# Altium PCB PCB.PcbDoc
Units mm, origin at the board's own origin, x right, y up, seen from the top; angles counter-clockwise.
Board outline 57.66 x 38.61 mm, 4 copper layers (Top Layer, Signal Layer 1, Signal Layer 2, Bottom Layer), stack 1.54 mm thick; 26 components, 96 nets, 348 pads, 113 vias.
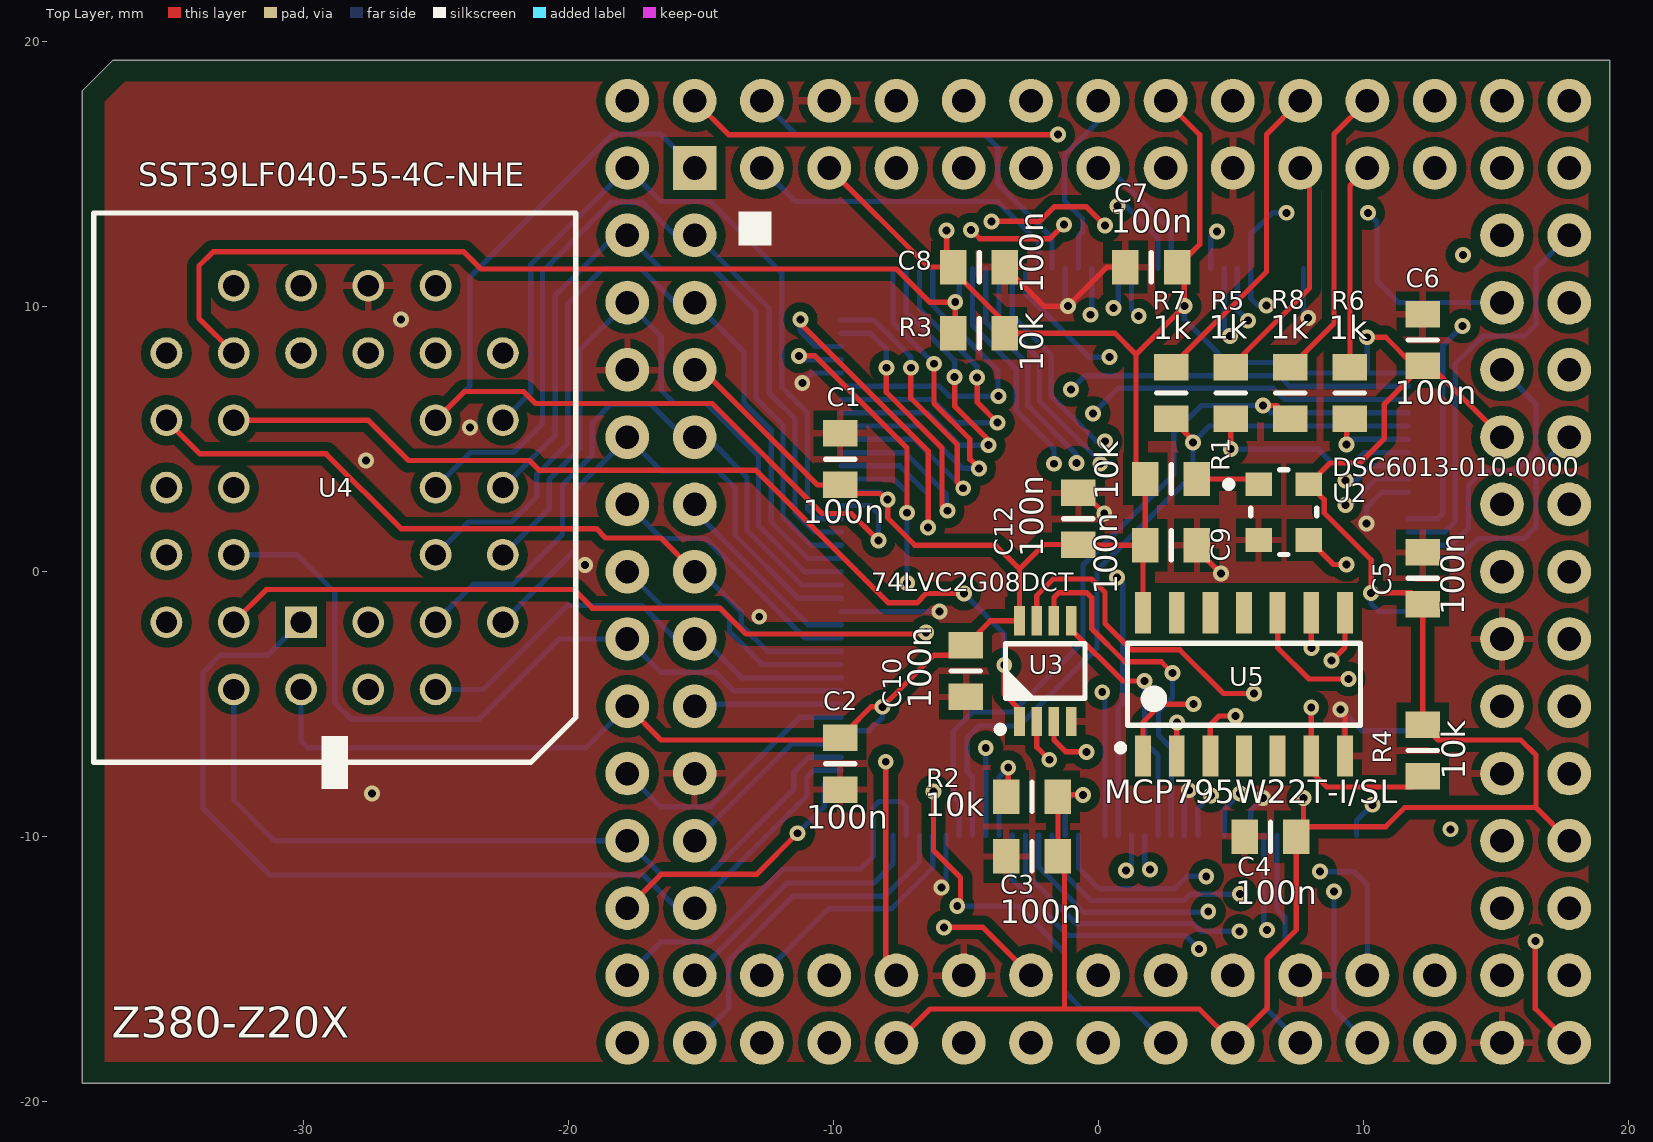
[diagram p0: Top Layer view]
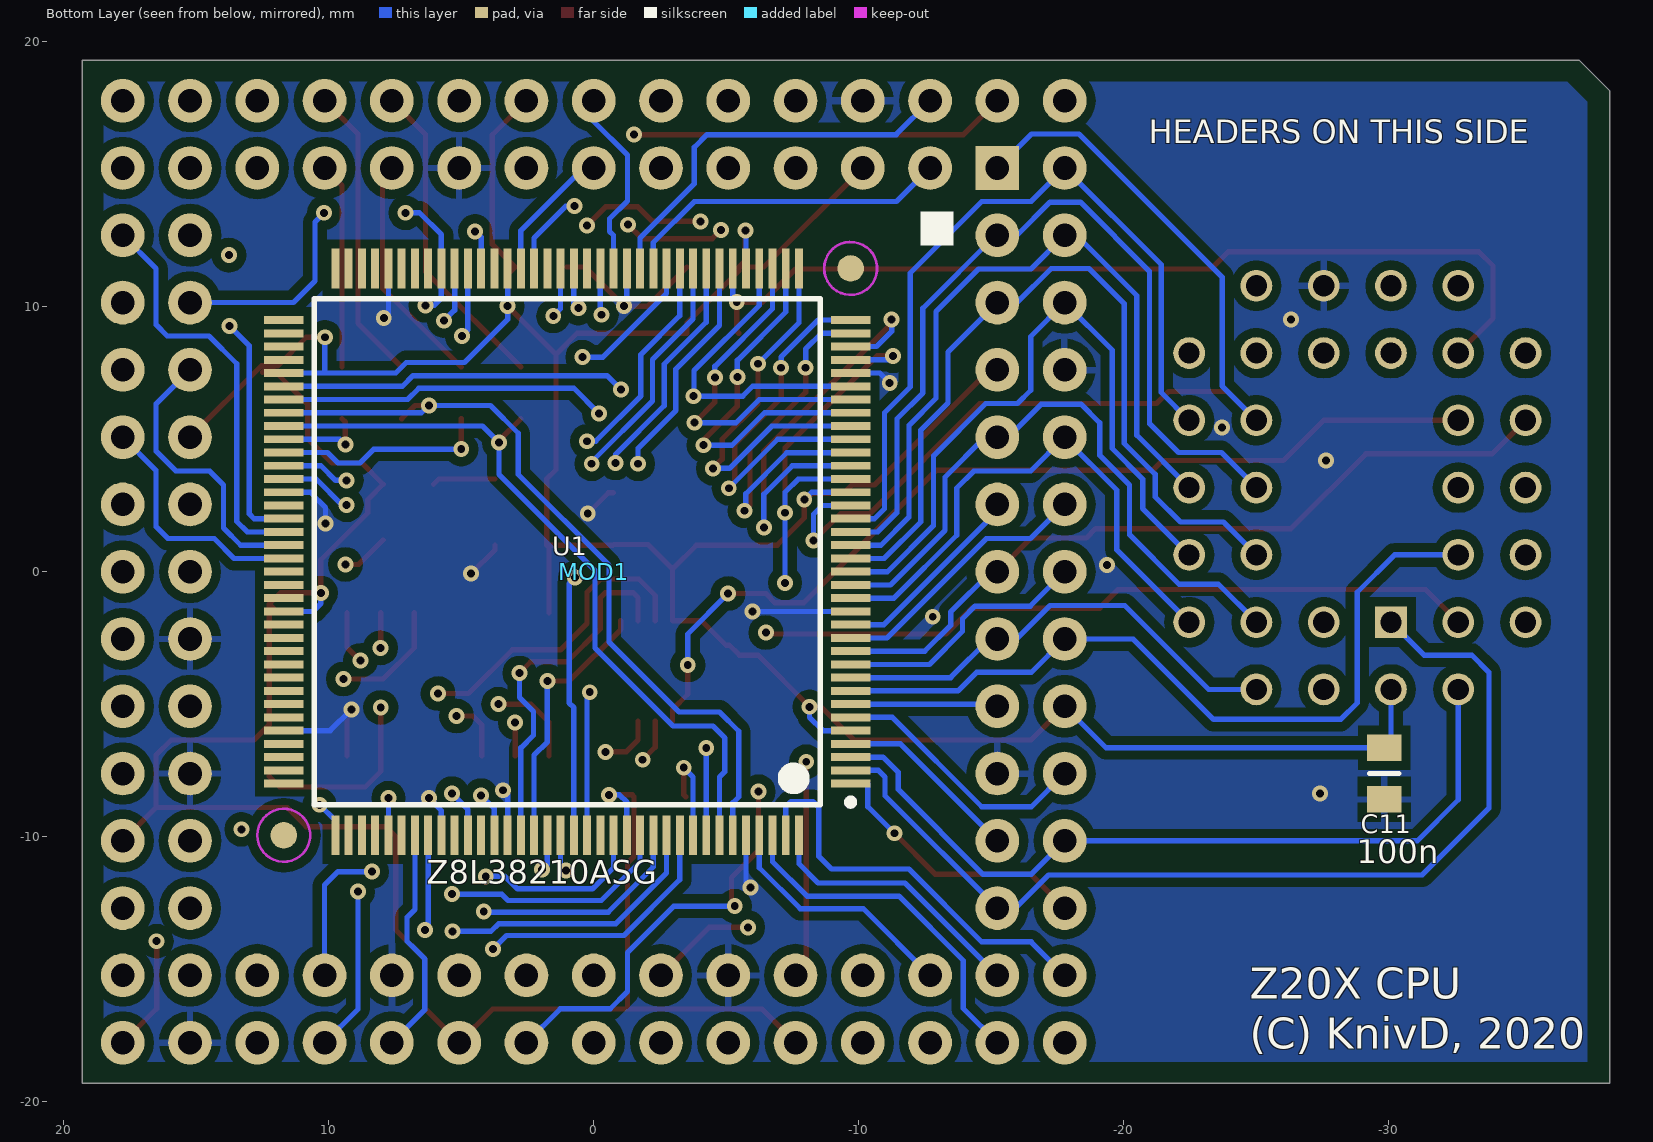
[diagram p1: Bottom Layer view, seen from below]
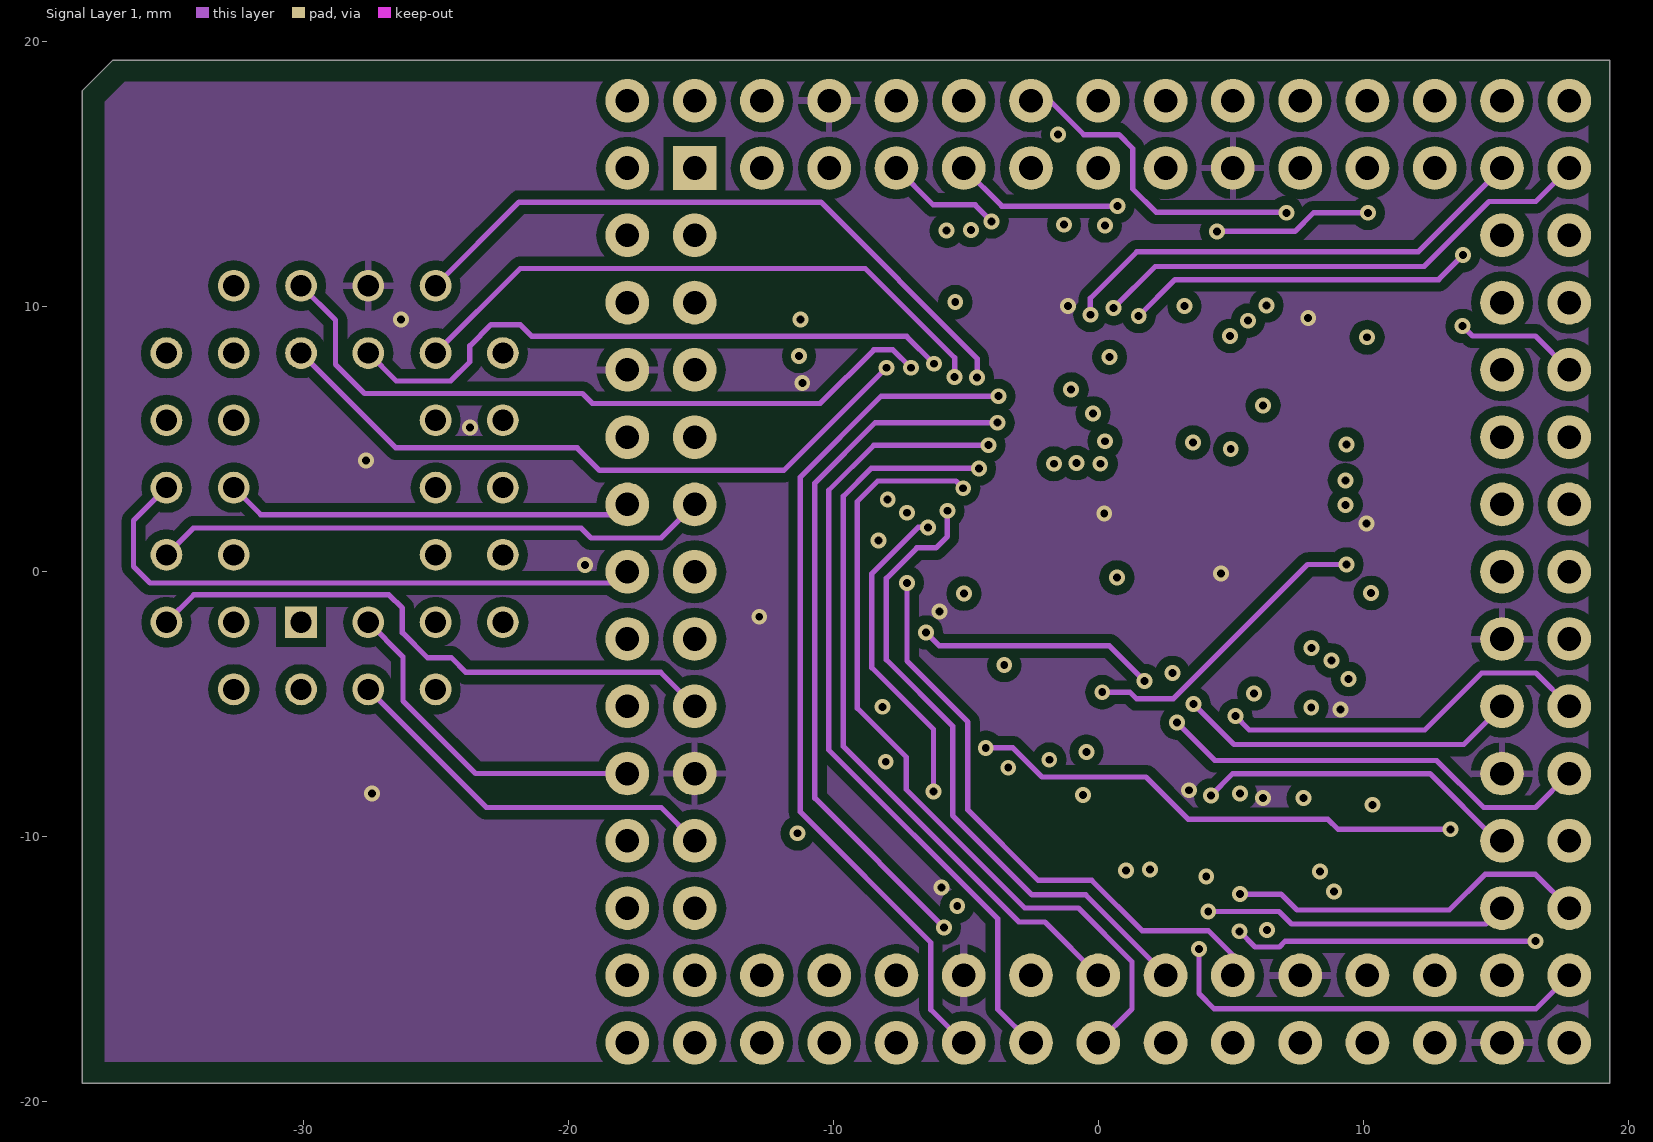
[diagram p2: Signal Layer 1]
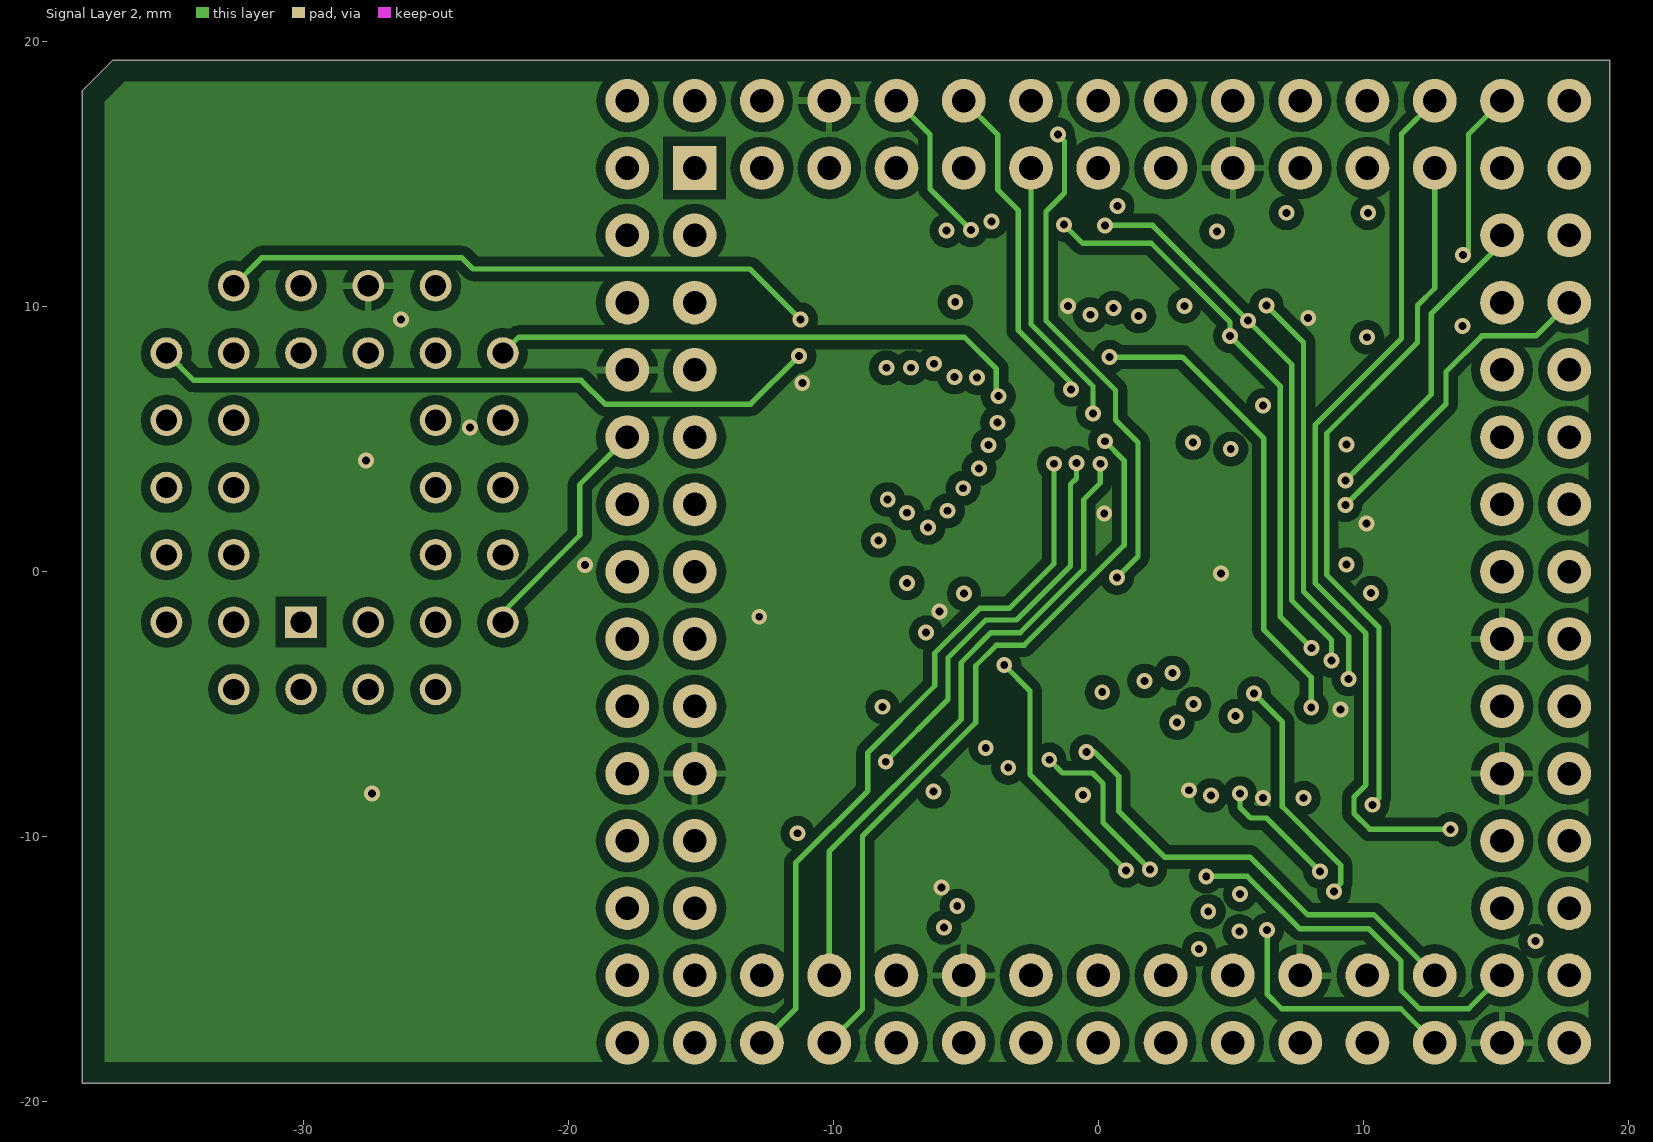
[diagram p3: Signal Layer 2]
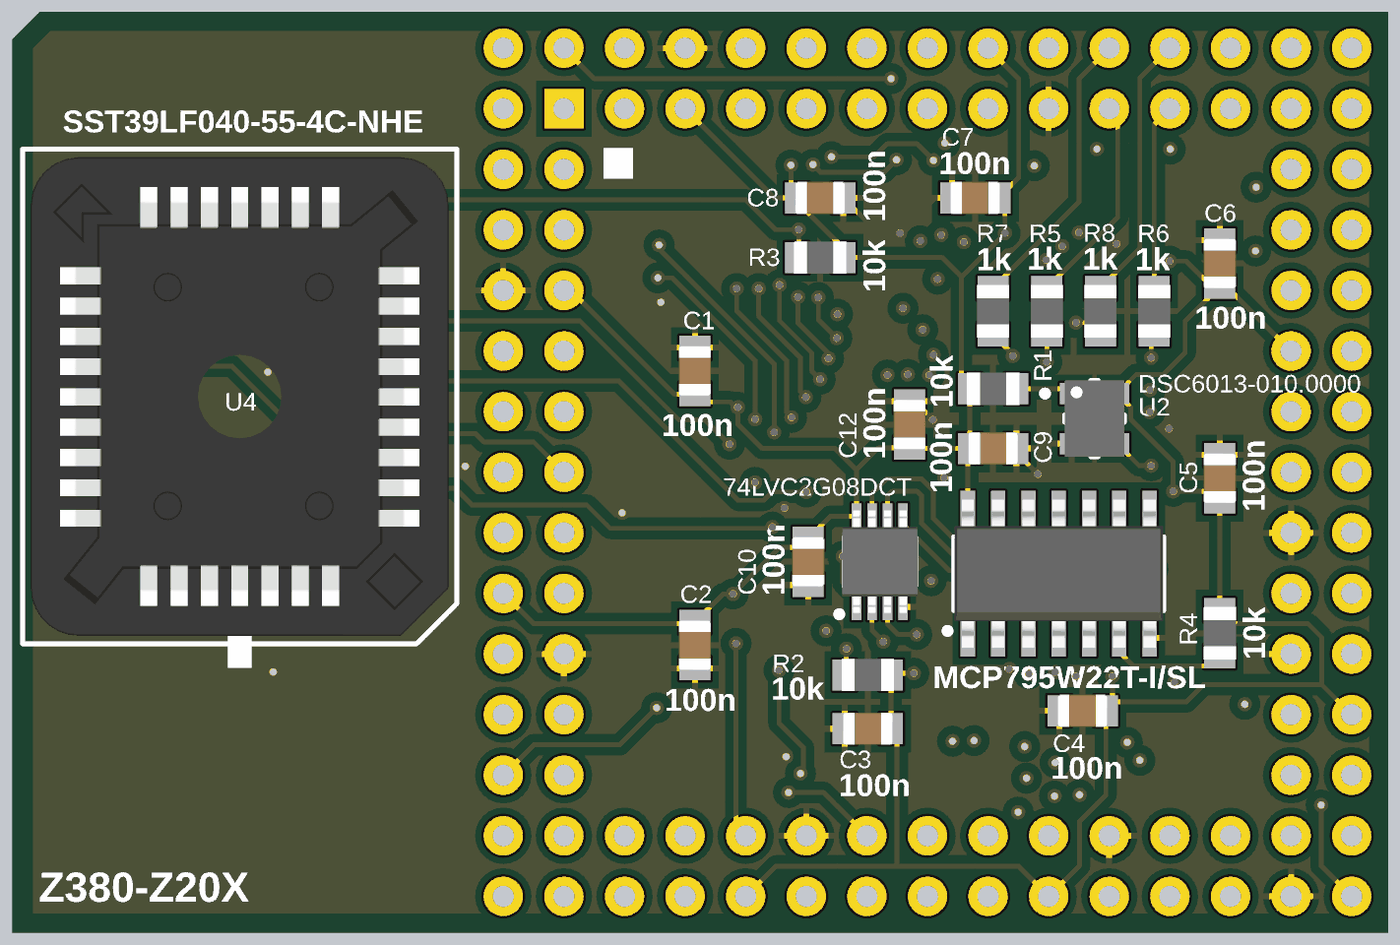
[diagram p4: 3D render of the assembled board from above, using the file's embedded part models]

## Layer stack, top to bottom
Top Solder: solder mask 0.0102, Solder Resist, Dk 3.5
Top Layer: signal copper 0.0356
Dielectric 1: core 0.508, FR-4, Dk 4.2
Signal Layer 1: signal copper 0.036
Dielectric 3: prepreg 0.381, Dk 4.2
Signal Layer 2: signal copper 0.036
Dielectric 2: core 0.508, Dk 4.2
Bottom Layer: signal copper 0.0356
Solder Side: solder mask 0.0102, Solder Resist, Dk 3.5

## Board outline
-38.354,-19.304 19.304,-19.304 19.304,19.304 -37.211,19.304 -38.354,18.161

## Design rules (kind name [scope] priority, off if disabled: settings)
Clearance Clearance_Poly [(IsRegion)] p1: gap=0.35 ignorepadtopadclearanceinfootprint=TRUE
Clearance [All] p2: gap=0.24 ignorepadtopadclearanceinfootprint=TRUE
DiffPairsRouting [All] p1: maxlimit=1 minlimit=0.15 mostfreqgap=0.2 toplayer_minwidth=0.2 toplayer_maxwidth=1 toplayer_prefwidth=0.2 midlayer1_minwidth=0.2 midlayer1_maxwidth=1 midlayer1_prefwidth=0.2 midlayer2_minwidth=0.2 midlayer2_maxwidth=1 midlayer2_prefwidth=0.2 bottomlayer_minwidth=0.2 bottomlayer_maxwidth=1 bottomlayer_prefwidth=0.2 maxuncoupledlength=12.7
HoleSize [All] p1 off: absolutevalues=TRUE maxlimit=2.5 minlimit=0.025 maxpercent=80.000 minpercent=20.000
HoleToHoleClearance [All] p1 off: gap=0 allowstackedmicrovias=TRUE
LayerPairs [All] p1 off: enforce=TRUE
MaxMinImpedance [InNet('ANT50R')] p1: minimum=49.90 maximum=50.10
MinimumSolderMaskSliver [All] p1 off: minsoldermaskwidth=-50
NetAntennae [All] p1 off: netantennaetolerance=0
PlaneClearance [All] p1: clearance=0.5
PlaneConnect [All] p1: planeconnectstyle=Direct reliefexpansion=0.5 reliefentries=4 reliefconductorwidth=0.35 reliefairgap=0.35
PolygonConnect [All] p1: thpad.connectstyle=Relief thpad.reliefconductorwidth=0.25 thpad.reliefentries=4 thpad.polygonreliefangle="90 Angle" thpad.airgapwidth=0.35 smdpad.connectstyle=Relief smdpad.reliefconductorwidth=0.25 smdpad.reliefentries=4 smdpad.polygonreliefangle="90 Angle" smdpad.airgapwidth=0.35 via.connectstyle=Direct via.reliefconductorwidth=0.35 via.reliefentries=4 via.polygonreliefangle="90 Angle" via.airgapwidth=0.35
RoutingCorners [All] p1: cornerstyle=45-Degree minsetback=2 maxsetback=2
RoutingVias [All] p1: holewidth=0.3 width=0.6 viastyle="Through Hole" minholewidth=0.3 minwidth=0.6 maxholewidth=1 maxwidth=2
SilkToBoardRegionClearance [All] p1 off:
SilkToSilkClearance [All] p1 off: silktosilkclearance=-50
SilkToSolderMaskClearance [IsPad] p1 off: minsilkscreentomaskgap=-50 clearancetoexposedcopper=TRUE
SolderMaskExpansion [All] p1: expansion=0.102
Width [All] p1: maxlimit=0.5 minlimit=0.2 preferedwidth=0.2
18 further rules are at their usual default settings.

## Components (designator, comment, footprint, x,y, rotation, side; value= is the part's Value field where it differs from the comment)
C1 "100n" _0805_CAP -9.75,4.25 r90 top locked
C2 "100n" _0805_CAP -9.75,-7.25 r90 top locked
C3 "100n" _0805_CAP -2.5,-10.75 r180 top locked
C4 "100n" _0805_CAP 6.5,-10 r0 top locked
C5 "100n" _0805_CAP 12.25,-0.25 r90 top locked
C6 "100n" _0805_CAP 12.25,8.75 r90 top locked
C7 "100n" _0805_CAP 2,11.5 r180 top locked
C8 "100n" _0805_CAP -4.5,11.5 r0 top locked
C9 "100n" _0805_CAP 2.75,1 r180 top locked
C10 "100n" _0805_CAP -5,-3.75 r90 top locked
C11 "100n" _0805_CAP -29.845,-7.62 r90 bottom locked
C12 "100n" _0805_CAP -0.75,2 r270 top locked
MOD1 "Z20X CPU Module" PGA100X15 0,0 r0 bottom locked
R1 "10k" _0805_RES 2.75,3.5 r180 top locked
R2 "10k" _0805_RES -2.5,-8.5 r0 top locked
R3 "10k" _0805_RES -4.5,9 r0 top locked
R4 "10k" _0805_RES 12.25,-6.75 r90 top locked
R5 "1k" _0805_RES 5,6.75 r90 top locked
R6 "1k" _0805_RES 9.5,6.75 r90 top locked
R7 "1k" _0805_RES 2.75,6.75 r90 top locked
R8 "1k" _0805_RES 7.25,6.75 r90 top locked
U1 "Z8L38210ASG" QFP50P2200X2200X170-144N 1,0.75 r0 bottom locked
U2 "DSC6013-010.0000" OSC_ABRACON_ASEMPC 7,2.25 r0 top locked
U3 "74LVC2G08DCT" SOP65P400X130-8N -2,-3.75 r90 top locked
U4 "SST39LF040-55-4C-NHE" "PLCC32-T/H socket" -28.829,3.175 r180 top locked
U5 "MCP795W22T-I/SL" SOIC127P600X175-14N 5.5,-4.25 r90 top locked

## Footprints (in the part's own frame and the unit in brackets; to place one, negate y for a bottom-side part, rotate by r counter-clockwise, add the part's x,y. Pads: shape width x height; smd on the part's side, far side on the other; paste and mask are expansions set on the pad)
_0805_CAP [mm]
  rect 1x1.3 smd: 1(-0.975,0) 2(0.975,0)
  silkscreen extent 0,-0.55 0,0.55, body extent -1.05,-0.67 1.05,0.68, height 1.1
_0805_RES [mm]
  rect 1x1.3 smd: 1(-0.975,0) 2(0.975,0)
  silkscreen extent 0,-0.55 0,0.55, body extent -1.1,-0.67 1.1,0.68, height 0.6
OSC_ABRACON_ASEMPC [mm] "4 Pins, 3.2x2.5mm, Performance Plastic Package Ultra Miniature Pure Silicon Clock Oscillator, ASEMP Serie CMOS Version"
  rect 1x0.9 smd: 1(-0.95,1.05) 2(-0.95,-1.05) 3(0.95,-1.05) 4(0.95,1.05)
  silkscreen extent -2.2,-1.6 1.25,1.6, body extent -1.25,-1.6 1.25,1.6, height 1
PGA100X15 [mil] "PGA module, 100 pins, 2.54 pitch"
  rect 65x65 hole 35: 1(-600,-600)
  round 65 hole 35: 2(-700,-600) 3(-600,-500) 4(-700,-500) 5(-600,-400) 6(-700,-400) 7(-600,-300) 8(-700,-300) 9(-600,-200) 10(-700,-200) 11(-600,-100) 12(-700,-100) 13(-600,0) 14(-700,0) 15(-600,100) 16(-700,100) 17(-600,200) 18(-700,200) 19(-600,300) 20(-700,300) 21(-600,400) 22(-700,400) 23(-600,500) 24(-700,500) 25(-600,600) 26(-700,600) 27(-600,700) 28(-500,600) 29(-500,700) 30(-400,600) 31(-400,700) 32(-300,600) 33(-300,700) 34(-200,600) 35(-200,700) 36(-100,600) 37(-100,700) 38(0,600) 39(0,700) 40(100,600) 41(100,700) 42(200,600) 43(200,700) 44(300,600) 45(300,700) 46(400,600) 47(400,700) 48(500,600) 49(500,700) 50(600,600) 51(600,700) 52(700,600) 53(600,500) 54(700,500) 55(600,400) 56(700,400) 57(600,300) 58(700,300) 59(600,200) 60(700,200) 61(600,100) 62(700,100) 63(600,0) 64(700,0) 65(600,-100) 66(700,-100) 67(600,-200) 68(700,-200) 69(600,-300) 70(700,-300) 71(600,-400) 72(700,-400) 73(600,-500) 74(700,-500) 75(600,-600) 76(700,-600) 77(600,-700) 78(500,-600) 79(500,-700) 80(400,-600) 81(400,-700) 82(300,-600) 83(300,-700) 84(200,-600) 85(200,-700) 86(100,-600) 87(100,-700) 88(0,-600) 89(0,-700) 90(-100,-600) 91(-100,-700) 92(-200,-600) 93(-200,-700) 94(-300,-600) 95(-300,-700) 96(-400,-600) 97(-400,-700) 98(-500,-600) 99(-500,-700) 100(-600,-700) 101(-700,-700) 102(-700,700) 103(700,700) 104(700,-700)
  silkscreen extent -535,-535 -486,-485
"PLCC32-T/H socket" [mm] "8432-11B1-RK-TP"
  rect 1.2x1.2 hole 0.8: 1(1.27,5.08)
  round 1.2 hole 0.8: 2(-1.27,7.62) 3(-1.27,5.08) 4(-3.81,7.62) 5(-6.35,5.08) 6(-3.81,5.08) 7(-6.35,2.54) 8(-3.81,2.54) 9(-6.35,0) 10(-3.81,0) 11(-6.35,-2.54) 12(-3.81,-2.54) 13(-6.35,-5.08) 14(-3.81,-7.62) 15(-3.81,-5.08) 16(-1.27,-7.62) 17(-1.27,-5.08) 18(1.27,-7.62) 19(1.27,-5.08) 20(3.81,-7.62) 21(6.35,-5.08) 22(3.81,-5.08) 23(6.35,-2.54) 24(3.81,-2.54) 25(6.35,0) 26(3.81,0) 27(6.35,2.54) 28(3.81,2.54) 29(6.35,5.08) 30(3.81,7.62) 31(3.81,5.08) 32(1.27,7.62)
  silkscreen extent -9.1,-10.37 9.1,11.37, body extent -8.76,-10.03 8.76,10.03, height 8.4
QFP50P2200X2200X170-144N [mm] "QFP, 144-Leads, Body 20x20mm (BSC), Pitch 0.50mm, IPC Medium Density"
  round 1 smd paste-0.51 mask+0.5: 0(-10.7,-10.7) 0(10.7,10.7)
  rect 1.5x0.3 smd: 1(-10.7,8.75) 2(-10.7,8.25) 3(-10.7,7.75) 4(-10.7,7.25) 5(-10.7,6.75) 6(-10.7,6.25) 7(-10.7,5.75) 8(-10.7,5.25) 9(-10.7,4.75) 10(-10.7,4.25) 11(-10.7,3.75) 12(-10.7,3.25) 13(-10.7,2.75) 14(-10.7,2.25) 15(-10.7,1.75) 16(-10.7,1.25) 17(-10.7,0.75) 18(-10.7,0.25) 19(-10.7,-0.25) 20(-10.7,-0.75) 21(-10.7,-1.25) 22(-10.7,-1.75) 23(-10.7,-2.25) 24(-10.7,-2.75) 25(-10.7,-3.25) 26(-10.7,-3.75) 27(-10.7,-4.25) 28(-10.7,-4.75) 29(-10.7,-5.25) 30(-10.7,-5.75) 31(-10.7,-6.25) 32(-10.7,-6.75) 33(-10.7,-7.25) 34(-10.7,-7.75) 35(-10.7,-8.25) 36(-10.7,-8.75) 73(10.7,-8.75) 74(10.7,-8.25) 75(10.7,-7.75) 76(10.7,-7.25) 77(10.7,-6.75) 78(10.7,-6.25) 79(10.7,-5.75) 80(10.7,-5.25) 81(10.7,-4.75) 82(10.7,-4.25) 83(10.7,-3.75) 84(10.7,-3.25) 85(10.7,-2.75) 86(10.7,-2.25) 87(10.7,-1.75) 88(10.7,-1.25) 89(10.7,-0.75) 90(10.7,-0.25) 91(10.7,0.25) 92(10.7,0.75) 93(10.7,1.25) 94(10.7,1.75) 95(10.7,2.25) 96(10.7,2.75) 97(10.7,3.25) 98(10.7,3.75) 99(10.7,4.25) 100(10.7,4.75) 101(10.7,5.25) 102(10.7,5.75) 103(10.7,6.25) 104(10.7,6.75) 105(10.7,7.25) 106(10.7,7.75) 107(10.7,8.25) 108(10.7,8.75)
  rect 0.3x1.5 smd: 37(-8.75,-10.7) 38(-8.25,-10.7) 39(-7.75,-10.7) 40(-7.25,-10.7) 41(-6.75,-10.7) 42(-6.25,-10.7) 43(-5.75,-10.7) 44(-5.25,-10.7) 45(-4.75,-10.7) 46(-4.25,-10.7) 47(-3.75,-10.7) 48(-3.25,-10.7) 49(-2.75,-10.7) 50(-2.25,-10.7) 51(-1.75,-10.7) 52(-1.25,-10.7) 53(-0.75,-10.7) 54(-0.25,-10.7) 55(0.25,-10.7) 56(0.75,-10.7) 57(1.25,-10.7) 58(1.75,-10.7) 59(2.25,-10.7) 60(2.75,-10.7) 61(3.25,-10.7) 62(3.75,-10.7) 63(4.25,-10.7) 64(4.75,-10.7) 65(5.25,-10.7) 66(5.75,-10.7) 67(6.25,-10.7) 68(6.75,-10.7) 69(7.25,-10.7) 70(7.75,-10.7) 71(8.25,-10.7) 72(8.75,-10.7) 109(8.75,10.7) 110(8.25,10.7) 111(7.75,10.7) 112(7.25,10.7) 113(6.75,10.7) 114(6.25,10.7) 115(5.75,10.7) 116(5.25,10.7) 117(4.75,10.7) 118(4.25,10.7) 119(3.75,10.7) 120(3.25,10.7) 121(2.75,10.7) 122(2.25,10.7) 123(1.75,10.7) 124(1.25,10.7) 125(0.75,10.7) 126(0.25,10.7) 127(-0.25,10.7) 128(-0.75,10.7) 129(-1.25,10.7) 130(-1.75,10.7) 131(-2.25,10.7) 132(-2.75,10.7) 133(-3.25,10.7) 134(-3.75,10.7) 135(-4.25,10.7) 136(-4.75,10.7) 137(-5.25,10.7) 138(-5.75,10.7) 139(-6.25,10.7) 140(-6.75,10.7) 141(-7.25,10.7) 142(-7.75,10.7) 143(-8.25,10.7) 144(-8.75,10.7)
  Top Layer keep-out circle w0.1: c10.7,10.7 r1
  Top Layer keep-out circle w0.1: c-10.7,-10.7 r1
  silkscreen extent -10.82,-9.55 9.55,9.57, body extent -11,-11 11,11, height 1.7
SOIC127P600X175-14N [mm] "SOIC 14, Pitch 1.27mm - Body 4x8.75mm, IPC Medium Density"
  rect 1.55x0.6 smd: 1(-2.7,3.81) 2(-2.7,2.54) 3(-2.7,1.27) 4(-2.7,0) 5(-2.7,-1.27) 6(-2.7,-2.54) 7(-2.7,-3.81) 8(2.7,-3.81) 9(2.7,-2.54) 10(2.7,-1.27) 11(2.7,0) 12(2.7,1.27) 13(2.7,2.54) 14(2.7,3.81)
  silkscreen extent -2.52,-4.4 1.55,4.78, body extent -3.1,-4.37 3.1,4.38, height 1.75
SOP65P400X130-8N [mm] "SOP, 0.65mm, Pitch; 8 Pin, 2.80mm W X 2.95mm L X 1.30mm H Body, PC Medium Density"
  rect 1.1x0.4 smd: 1(-1.9,0.975) 2(-1.9,0.325) 3(-1.9,-0.325) 4(-1.9,-0.975) 5(1.9,-0.975) 6(1.9,-0.325) 7(1.9,0.325) 8(1.9,0.975)
  silkscreen extent -2.32,-1.5 1.03,1.82, body extent -2.15,-1.57 2.15,1.58, height 1.3

## Part data
C1 C2 C3 C4 C5 C6 C7 C8 C9 C10 C11 C12: library part Capacitor, "Capacitor"
R1 R2 R3 R4 R5 R6 R7 R8: library part Resistor, "Resistor"
U1: library part Z8x382, "High-Performance Data Communication Processor", Manufacturer=Zilog, Variant="Z80382 (5V/20MHz); Z8L382 (3.3V/10MHz)"
U2: library part DSC1033, "Low-Power CMOS Oscillator", Manufacturer=Microchip
U3: library part SN74xxx2G08, "DUAL 2-INPUT AND GATE", Manufacturer="Texas Instruments", Package="DCT (SSOP65)"
U4: library part "SST39LF/VF040 (PLCC)", "512Kx8 CMOS Multi-Purpose Flash", Manufacturer=Microchip
U5: library part MCP795, "SPI Real-Time Clock Calendar with  Enhanced Features and Battery Switchover", Manufacturer=Microchip

## Via types
v1: diameter 0.6, hole 0.3, Top Layer to Bottom Layer, tented both sides, 113 vias

## Nets (pads, with @x,y where several pads share a name; then routed paths per layer and width w, separated by ;. In a path a pad name is that pad's centre, name@x,y a point inside that pad or via, vN(x,y) a via of type N, cw(c..) or ccw(c..) an arc to the next point about the centre after c; other vN are vias at no path point)
10MHz: U1.128 U2.3 | length 18.7
  Top Layer w0.2: U2.3 8.875,0.275 v1(9.375,0.275)
  Signal Layer 1 w0.2: v1(0.15,-4.55) 1.2,-4.55 1.45,-4.8 2.825,-4.8 7.9,0.275 v1(9.375,0.275)
  Bottom Layer w0.2: v1(0.15,-4.55) 0.25,-4.65 U1.128
+3V3: C1.1 C2.2 C3.1 C4.2 C5.1 C6.1 C7.1 C8.1 C9.2 C10.2 C11.2 C12.2 MOD1.7 MOD1.18 MOD1.33 MOD1.43 MOD1.56 MOD1.67 MOD1.87 MOD1.96 R1.2 R2.2 R3.2 R4.2 U1.5 U1.23 U1.41 U1.59 U1.77 U1.95 U1.113 U1.131 U2.4 U3.8 U4.32 U5.14 | length 192.8
  Top Layer w0.2: MOD1.18 -16.51,-6.35 -9.825,-6.35 C2.2 -9.475,-6 -8.575,-5.1 v1(-8.15,-5.1) -6.2,-3.15 -5.5,-3.15 -5.125,-2.775 C10.2 -4.075,-1.85 U3.8 -2.975,0.1 ; MOD1.7 -14.945,7.62 -10.6,3.275 C1.1 -9.425,2.95 -8.25,2.95 -8.025,2.725 v1(-7.95,2.725) -7.95,2.025 -6.925,1 -3.875,1 -2.975,0.1 ; MOD1.96 -6.42,11.5 C8.1 ; MOD1.33 -6.35,-16.51 -1.275,-16.51 ; v1(-5.725,12.875) -5.725,11.75 C8.1 ; C8.1@-5.475,11.35 -3.525,9.4 R3.2 0.625,9 1.425,8.2 ; C8.1@-5.475,11.475 C8.1 ; v1(-0.575,-8.425) -1.45,-8.425 R2.2 C3.1 -1.275,-11 -1.275,-16.51 ; U5.14 1.69,0.915 C9.2 ; MOD1.87 3.825,16.495 3.825,12.35 C7.1 3.25,11.225 v1(3.25,10.025) 1.425,8.2 ; v1(7.75,-8.55) C4.2@7.75,-9.725 ; v1(10.15,8.85) 10.85,8.85 11.925,7.775 C6.1 ; C5.1@11.975,-1.5 C5.1 ; C6.1@12.5,7.525 C6.1 ; MOD1.67 12.545,7.775 C6.1 ; MOD1.56 16.525,-8.905 ; -2.975,0.1 -2.05,1.025 C12.2 -0.725,1 C9.2 ; -1.275,-16.51 3.81,-16.51 MOD1.43 6.375,-16.485 6.375,-14.625 7.475,-13.525 C4.2 C4.2@7.75,-9.725 ; 1.425,8.2 1.425,3.85 R1.2 C9.2 ; C4.2@7.75,-9.725 7.85,-9.625 10.85,-9.625 11.57,-8.905 16.525,-8.905 ; C5.1 R4.2 12.825,-6.35 15.95,-6.35 16.525,-6.925 16.525,-8.905 ; C5.1 11.825,-0.8 v1(10.3,-0.8) 10.3,0.45 8.525,2.225 8.525,2.725 U2.4 8.75,4.1 9.875,4.1 10.8,5.025 10.8,6.325 C6.1
  Bottom Layer w0.2: U4.32 -30.099,-6.391 C11.2 -19.345,-6.645 MOD1.18 ; U1.5 -8.65,-6 -8.15,-5.5 v1(-8.15,-5.1) ; U1.23 -8.225,3 v1(-7.95,2.725) ; U1.41 -5.75,12.85 v1(-5.725,12.875) ; U1.131 -1.25,-8.7 -0.975,-8.425 v1(-0.575,-8.425) ; U1.59 v1(3.25,10.025) 3.25,9.525 4.875,7.9 7.075,7.9 7.475,7.5 10.15,7.5 ; U1.113 v1(7.75,-8.55) ; v1(10.15,8.85) 10.15,7.5 ; v1(10.3,-0.8) 10.3,-1.2 10.6,-1.5 U1.95 ; U1.77 10.15,7.5
A0: MOD1.1 U1.22 U4.12 | length 39.1
  Top Layer w0.2: U4.12 -23.934,6.8 -21.7,6.8 -21.25,6.35 -14.575,6.35 -10.425,2.2 -9.325,2.2 v1@-8.412,1.287
  Bottom Layer w0.2: U4.12 -23.725,7.009 -23.725,11.125 -18.325,16.525 -16.525,16.525 MOD1.1 ; U1.22 -8.625,2.5 -8.59,2.465 -8.59,2.46 -8.3,2.17 v1(-8.3,1.175)
A1: MOD1.2 U1.21 U4.11 | length 29.7
  Bottom Layer w0.2: U4.11 -21.425,6.769 -21.425,11.595 MOD1.2 -16.515,13.975 -14.65,13.975 -11.95,11.275 -11.95,6.975 -10.975,6 -10.975,2.378 -10.597,2 U1.21
A2: MOD1.3 U1.20 U4.10 | length 32.3
  Bottom Layer w0.2: U4.10 -23.694,4.5 -22.075,4.5 -20.985,5.59 -20.985,11.34 -18.375,13.95 -17.225,13.95 -15.975,12.7 MOD1.3 -15.178,12.7 -12.425,9.947 -12.425,6.75 -11.45,5.775 -11.45,2.231 -10.719,1.5 U1.20
A3: MOD1.4 U1.19 U4.9 | length 28.6
  Bottom Layer w0.2: U4.9 -20.5,5.154 -20.5,10.425 -18.225,12.7 MOD1.4 -16.505,11.425 -14.525,11.425 -12.925,9.825 -12.925,6.55 -11.9,5.525 -11.9,2.059 -10.841,1 U1.19
A4: MOD1.5 U1.18 U4.8 | length 31.1
  Bottom Layer w0.2: U4.8 -23.779,1.875 -22.15,1.875 -21.2,2.825 -21.2,3.675 -20.025,4.85 -20.025,10.125 -18.7,11.45 -17.275,11.45 -15.985,10.16 MOD1.5 -13.375,8.295 -13.375,6.375 -12.35,5.35 -12.35,1.886 -10.964,0.5 U1.18
A5: MOD1.6 U1.17 U4.7 | length 26.5
  Bottom Layer w0.2: U4.7 -20.725,2.389 -20.725,3.5 -19.575,4.65 -19.575,8.365 MOD1.6 -16.5,8.88 -16.5,6.85 -16,6.35 -14.8,6.35 -12.825,4.375 -12.825,1.739 -11.086,0 U1.17
A6: MOD1.9 U1.16 U4.6 | length 24.5
  Bottom Layer w0.2: U4.6 -23.589,-0.475 -22.1,-0.475 -20.225,1.4 -20.225,3.275 -19.1,4.4 -19.1,5.625 -18.4,6.325 -16.9,6.325 -15.655,5.08 MOD1.9 -14.78,5.08 -13.265,3.565 -13.265,1.557 -11.208,-0.5 U1.16
A7: MOD1.10 U1.15 U4.5 | length 29.5
  Signal Layer 2 w0.2: U4.5 -22.479,-1.529 -19.575,1.375 -19.575,3.285 MOD1.10
  Bottom Layer w0.2: U4.5 -19.75,0.824 -19.75,3.075 -17.78,5.045 MOD1.10 -16.5,3.8 -14.35,3.8 -13.705,3.155 -13.705,1.374 -11.331,-1 U1.15
A8: MOD1.11 U1.13 U4.27 | length 28.6
  Signal Layer 1 w0.2: U4.27 -34.164,1.65 -19.525,1.65 -19.15,1.275 -16.505,1.275 MOD1.11
  Bottom Layer w0.2: MOD1.11 -15.24,2.287 -10.953,-2 U1.13
A9: MOD1.12 U1.12 U4.26 | length 25.6
  Signal Layer 1 w0.2: U4.26 -31.614,2.15 -18.17,2.15 MOD1.12
  Bottom Layer w0.2: MOD1.12 -16.49,1.25 -14.825,1.25 -11.075,-2.5 U1.12
A10: MOD1.13 U1.11 U4.23 | length 29.4
  Top Layer w0.2: U4.23 -33.914,4.45 -29.15,4.45 -26.325,1.625 -18.95,1.625 -18.6,1.275 -16.515,1.275 MOD1.13
  Bottom Layer w0.2: MOD1.13 -15,0 -13.475,-1.525 -13.475,-2.025 -12.5,-3 -12.24,-3 U1.11
A11: MOD1.14 U1.10 U4.25 | length 32.4
  Signal Layer 1 w0.2: U4.25 -36.425,1.929 -36.425,0.2 -35.8,-0.425 -18.205,-0.425 MOD1.14
  Bottom Layer w0.2: MOD1.14 -16.48,-1.3 -14.4,-1.3 -13.925,-1.775 -13.925,-2.25 -12.675,-3.5 -12.45,-3.5 U1.10
A12: MOD1.15 U1.9 U4.4 | length 17.8
  Bottom Layer w0.2: U4.4 -23.22,-4.445 -20.05,-1.275 -17.225,-1.275 -15.96,-2.54 MOD1.15 -14.935,-2.54 -13.475,-4 U1.9
A13: MOD1.16 U1.8 U4.28 | length 30
  Bottom Layer w0.2: U4.28 -30.235,0.635 -28.825,-0.775 -28.825,-4.95 -28.2,-5.575 -23.4,-5.575 -20.365,-2.54 MOD1.16 -16.52,-3.8 -14.45,-3.8 -13.75,-4.5 U1.8
A14: MOD1.17 U1.7 U4.29 | length 28.2
  Signal Layer 1 w0.2: U4.29 -34.149,-0.875 -26.775,-0.875 -26.275,-1.375 -26.275,-2.3 -25.325,-3.25 -24.425,-3.25 -23.875,-3.8 -16.52,-3.8 MOD1.17
  Bottom Layer w0.2: MOD1.17 -15.16,-5 U1.7
A15: MOD1.20 U1.6 U4.3 | length 23.1
  Signal Layer 1 w0.2: U4.3 -26.25,-3.214 -26.25,-4.875 -23.505,-7.62 MOD1.20
  Bottom Layer w0.2: MOD1.20 -16.525,-8.875 -14.65,-8.875 -11.275,-5.5 U1.6
A16: MOD1.21 U1.4 U4.2 | length 21.7
  Signal Layer 1 w0.2: U4.2 -23.104,-8.9 -16.5,-8.9 MOD1.21
  Bottom Layer w0.2: MOD1.21 -11.58,-6.5 U1.4
A17: MOD1.22 U1.3 U4.30 | length 30.5
  Bottom Layer w0.2: U4.30 -32.639,-8.611 -31.09,-10.16 MOD1.22 -16.515,-11.425 -14.7,-11.425 -11.5,-8.225 -11.5,-7.575 -10.925,-7 U1.3
A18: MOD1.23 U1.2 U4.1 | length 37.8
  Bottom Layer w0.2: U4.1 -31.344,-3.15 -33.15,-3.15 -33.8,-3.8 -33.8,-8.925 -31.275,-11.45 -17.175,-11.45 -15.925,-12.7 MOD1.23 -11,-8.46 -11,-7.75 -10.75,-7.5 U1.2
A19: MOD1.24 U1.1 | length 10.5
  Top Layer w0.2: MOD1.24 -16.505,-11.425 -12.9,-11.425 v1(-11.35,-9.875)
  Bottom Layer w0.2: v1(-11.35,-9.875) -10.35,-8.875 -10.35,-8 U1.1
A20: MOD1.25 U1.144 | length 10.3
  Bottom Layer w0.2: MOD1.25 -11.75,-11.75 -8.475,-11.75 -7.75,-11.025 U1.144
A21: MOD1.26 U1.143 | length 15.5
  Bottom Layer w0.2: MOD1.26 -16.515,-13.975 -14.65,-13.975 -11.9,-11.225 -8.975,-11.225 -8.5,-10.75 -8.5,-8.9 -8.275,-8.675 -7.45,-8.675 -7.25,-8.875 U1.143
A22: MOD1.27 U1.142 | length 13.4
  Bottom Layer w0.2: MOD1.27 -13.95,-16.49 -13.95,-14.675 -11.525,-12.25 -8.05,-12.25 -6.75,-10.95 U1.142
A23: MOD1.28 U1.141 | length 9.4
  Bottom Layer w0.2: MOD1.28 -10.185,-12.725 -7.8,-12.725 -6.25,-11.175 U1.141
BACK#: MOD1.54 U1.132 | length 22.6
  Signal Layer 1 w0.2: v1(5.35,-12.175) 6.9,-12.175 7.5,-12.775 13.25,-12.775 14.6,-11.425 16.505,-11.425 MOD1.54
  Bottom Layer w0.2: U1.132 -1.75,-10.95 -0.285,-12.415 3.235,-12.415 3.475,-12.175 v1(5.35,-12.175)
BKLA: MOD1.78 U1.109 | length 28
  Signal Layer 2 w0.2: v1(10.35,-8.8) 10.6,-8.55 10.6,-2.1 8.625,-0.125 8.625,5.225 12.05,8.65 12.05,10.05 12.7,10.7 MOD1.78
  Bottom Layer w0.2: U1.109 9.75,-9.4 v1(10.35,-8.8)
BREQ#: MOD1.53 U1.133 | length 19.9
  Signal Layer 1 w0.2: v1(4.15,-12.825) 6.825,-12.825 7.3,-13.3 14.64,-13.3 MOD1.53
  Bottom Layer w0.2: U1.133 -2.25,-11.15 -0.545,-12.855 4.12,-12.855 v1(4.15,-12.825)
CS0#: MOD1.29 U1.43 | length 35.7
  Signal Layer 2 w0.2: MOD1.29 -11.425,-16.505 -11.425,-11 -8.7,-8.275 -8.7,-6.83 -6.175,-4.305 -6.175,-3.075 -4.485,-1.385 -3.36,-1.385 -1.675,0.3 v1(-1.675,4.075)
  Bottom Layer w0.2: U1.43 -4.75,9.3 -3.1,7.65 -3.1,6.083 -1.675,4.658 v1(-1.675,4.075)
CS1#: MOD1.30 U1.45 | length 33.2
  Signal Layer 2 w0.2: MOD1.30 -10.16,-10.56 -5.175,-5.575 -5.175,-3.425 -4.05,-2.3 -2.947,-2.3 -0.55,0.097 -0.55,2.725 0.075,3.35 v1(0.075,4.075)
  Bottom Layer w0.2: U1.45 -3.75,9.544 -2.22,8.014 -2.22,6.45 -2.22,6.448 0.075,4.153 v1(0.075,4.075)
CS2#: MOD1.31 U1.46 | length 36.4
  Signal Layer 2 w0.2: MOD1.31 -8.9,-16.52 -8.9,-9.975 -4.625,-5.7 -4.625,-3.55 -3.85,-2.775 -2.8,-2.775 0.975,1 0.975,4.2 v1(0.25,4.925)
  Bottom Layer w0.2: U1.46 -3.25,9.667 -1.78,8.197 -1.78,6.63 -0.075,4.925 v1(0.25,4.925)
CS3#: MOD1.32 U1.44 | length 31.9
  Top Layer w0.2: v1(-8.025,-7.175) -8.025,-14.835 MOD1.32
  Signal Layer 2 w0.2: v1(-8.025,-7.175) -5.675,-4.825 -5.675,-3.25 -4.25,-1.825 -3.095,-1.825 -1.05,0.22 -1.05,3.3 -0.825,3.525 v1(-0.825,4.1)
  Bottom Layer w0.2: U1.44 -4.25,9.422 -2.66,7.832 -2.66,6.45 -2.66,6.266 -0.825,4.43 v1(-0.825,4.1)
CTS0: MOD1.71 U1.61 | length 15.3
  Signal Layer 1 w0.2: v1(4.475,12.85) 7.425,12.85 8.125,13.55 v1(10.175,13.55)
  Bottom Layer w0.2: U1.61 4.25,12.625 v1(4.475,12.85) ; v1(10.175,13.55) 10.525,13.2 10.525,10.975 11.34,10.16 MOD1.71
D0: MOD1.35 U1.31 U1.40 U4.13 | length 65
  Signal Layer 1 w0.2: MOD1.35 -6.325,-16.535 -6.325,-13.995 -11.25,-9.07 -11.25,3.575 -8.2,6.625 v1(-3.775,6.625)
  Signal Layer 2 w0.2: U4.13 -21.884,8.85 -5.05,8.85 -3.85,7.65 -3.85,6.7 v1(-3.775,6.625)
  Bottom Layer w0.2: U1.31 -6,7 -5.625,6.625 v1(-3.775,6.625) -3.79,6.64 -3.79,7.59 -6.25,10.05 U1.40
D1: MOD1.36 U1.30 U1.39 U4.14 | length 68.9
  Top Layer w0.2: v1(-5.825,-13.425) -4.355,-13.425 MOD1.36 ; v1(-4.575,7.325) -4.575,6.4 v1(-3.8,5.625)
  Signal Layer 1 w0.2: U4.14 -21.864,13.95 -10.475,13.95 -4.575,8.05 v1(-4.575,7.325) ; v1(-5.825,-13.425) -10.7,-8.55 -10.7,3.35 -8.425,5.625 v1(-3.8,5.625)
  Bottom Layer w0.2: U1.30 -6.25,6.5 -5.375,5.625 v1(-3.8,5.625) ; U1.39 -6.75,9.928 -4.575,7.753 v1(-4.575,7.325)
D2: MOD1.37 U1.29 U1.38 U4.15 | length 67.8
  Top Layer w0.2: v1(-5.425,7.35) -5.425,6.25 -4.15,4.975 v1(-4.15,4.775)
  Signal Layer 1 w0.2: U4.15 -21.824,11.45 -8.8,11.45 -5.425,8.075 v1(-5.425,7.35) ; v1(-4.15,4.775) -8.475,4.775 -10.175,3.075 -10.175,-6.725 -3.8,-13.1 -3.8,-16.52 MOD1.37
  Bottom Layer w0.2: U1.29 -6.45,6 -5.225,4.775 v1(-4.15,4.775) ; U1.38 -7.25,9.806 -5.425,7.981 v1(-5.425,7.35)
D3: MOD1.38 U1.28 U1.37 U4.17 | length 66.6
  Top Layer w0.2: v1(-6.2,7.85) -6.2,6.35 -4.85,5 -4.85,4.25 v1(-4.5,3.9)
  Signal Layer 1 w0.2: U4.17 -26.504,7.2 -24.45,7.2 -23.725,7.925 -23.725,8.525 -22.925,9.325 -21.825,9.325 -21.385,8.885 -7.235,8.885 v1(-6.2,7.85) ; v1(-4.5,3.9) -8.575,3.9 -9.625,2.85 -9.625,-6.6 -3,-13.225 -2.015,-13.225 MOD1.38
  Bottom Layer w0.2: U1.28 -6.725,5.5 -5.125,3.9 v1(-4.5,3.9) ; U1.37 -7.75,9.4 v1(-6.2,7.85)
D4: MOD1.39 U1.27 U1.36 U4.18 | length 72.2
  Top Layer w0.2: v1(-7.075,7.7) -7.075,6.55 -5.325,4.8 -5.325,3.375 v1(-5.1,3.15)
  Signal Layer 1 w0.2: U4.18 -28.8,9.496 -28.8,7.825 -27.7,6.725 -19.475,6.725 -19.1,6.35 -10.5,6.35 -8.475,8.375 -7.75,8.375 v1(-7.075,7.7) ; v1(-5.1,3.15) -5.375,3.425 -8.325,3.425 -9.1,2.65 -9.1,-5.15 -7.25,-7 -7.25,-8.225 -2.775,-12.7 -0.75,-12.7 1.275,-14.725 1.275,-16.505 MOD1.39
  Bottom Layer w0.2: U1.27 -6.95,5 v1(-5.1,3.15) ; U1.36 -8.472,9.5 -7.075,8.103 v1(-7.075,7.7)
D5: MOD1.40 U1.26 U1.35 U4.19 | length 64.3
  Top Layer w0.2: v1(-8,7.7) -8,6.775 -5.9,4.675 -5.9,2.5 v1(-5.7,2.3)
  Signal Layer 1 w0.2: U4.19 -26.519,4.675 -19.675,4.675 -18.825,3.825 -11.875,3.825 v1(-8,7.7) ; v1(-5.7,2.3) -5.7,1.325 -6.125,0.9 -6.85,0.9 -8,-0.25 -8,-3.325 -5.5,-5.825 -5.5,-9.2 -2.5,-12.2 -0.475,-12.2 2.54,-15.215 MOD1.40
  Bottom Layer w0.2: U1.26 -9.69,4.49 -7.29,4.49 -5.74,2.94 -5.74,2.34 v1(-5.7,2.3) ; U1.35 -8.595,9 -8,8.406 v1(-8,7.7)
D6: MOD1.41 U1.25 U1.34 U4.20 | length 67.5
  Top Layer w0.2: v1(-11.25,9.525) -11.25,9.375 -6.425,4.55 v1(-6.425,1.675) ; v1(-6.225,-8.3) -6.225,-10.525 -5.2,-11.55 -5.2,-12.5 v1(-5.325,-12.625)
  Signal Layer 1 w0.2: v1(-6.425,1.675) -6.8,1.675 -8.55,-0.075 -8.55,-3.625 -6.225,-5.95 v1(-6.225,-8.3)
  Signal Layer 2 w0.2: U4.20 -31.584,11.85 -24.025,11.85 -23.6,11.425 -13.15,11.425 v1(-11.25,9.525)
  Bottom Layer w0.2: v1(-11.25,9.525) -11.25,9.075 -10.675,8.5 U1.34 ; U1.25 -7.5,4 -6.425,2.925 v1(-6.425,1.675) ; v1(-5.325,-12.625) -3.025,-12.625 -1.275,-14.375 -1.275,-15.85 -0.625,-16.5 1.26,-16.5 MOD1.41
D7: MOD1.42 U1.24 U1.33 U4.21 | length 63.7
  Top Layer w0.2: v1(-11.3,8.15) -10.7,8.15 -7.225,4.675 v1(-7.225,2.225)
  Signal Layer 1 w0.2: v1(-7.225,-0.425) -7.225,-3.375 -4.925,-5.675 -4.925,-9 -2.275,-11.65 -0.25,-11.65 1.65,-13.55 4.15,-13.55 5.08,-14.48 MOD1.42
  Signal Layer 2 w0.2: U4.21 -34.149,7.225 -19.525,7.225 -18.625,6.325 -13.125,6.325 v1(-11.3,8.15)
  Bottom Layer w0.2: v1(-11.3,8.15) -11.15,8 U1.33 ; U1.24 -7.725,3.5 -7.225,3 v1(-7.225,2.225) v1(-7.225,-0.425)
DCD0: MOD1.74 U1.89 | length 15.4
  Bottom Layer w0.2: U1.89 13.075,1.5 13.475,1.9 13.475,7.85 14.525,8.9 16.1,8.9 16.525,9.325 16.525,11.445 MOD1.74
DSR0: MOD1.73 U1.84 | length 14.3
  Signal Layer 2 w0.2: v1(9.325,3.45) 12.575,6.7 12.575,9.75 15.24,12.415 MOD1.73
  Bottom Layer w0.2: v1(9.325,3.45) 9.75,3.45 10.3,4 U1.84
DTR0: MOD1.72 U1.85 | length 15.1
  Signal Layer 2 w0.2: v1(9.325,2.525) 13.125,6.325 13.125,7.55 14.48,8.905 16.525,8.905 MOD1.72
  Bottom Layer w0.2: v1(9.325,2.525) 9.5,2.525 10.475,3.5 U1.85
FCPU: MOD1.100 U1.127 | length 43
  Top Layer w0.2: MOD1.100 -13.96,16.5 v1(-1.525,16.5)
  Signal Layer 2 w0.2: v1(-1.525,16.5) -1.275,16.25 -1.275,14.3 -1.975,13.6 -1.975,9.475 0.65,6.85 0.65,5.725 1.5,4.875 1.5,0.575 v1(0.7,-0.225)
  Bottom Layer w0.2: v1(0.7,-0.225) 0.925,-0.45 0.925,-4.95 0.75,-5.125 U1.127
GND: C1.2 C2.1 C3.2 C4.1 C5.2 C6.2 C7.2 C8.2 C9.1 C10.1 C11.1 C12.1 MOD1.8 MOD1.19 MOD1.34 MOD1.44 MOD1.51 MOD1.57 MOD1.61 MOD1.84 MOD1.97 U1.14 U1.32 U1.50 U1.68 U1.86 U1.104 U1.117 U1.122 U1.140 U2.2 U3.4 U4.16 U5.7 | length 29.8
  Top Layer w0.2: C8.2 -2.05,10.025 v1(-1.15,10.025) 0.325,11.5 C7.2 ; C12.1 -0.55,2.975 v1(0.225,2.2) ; C9.1 3.725,0.825 v1(4.625,-0.075) ; v1(9.15,-5.2) 9.31,-5.36 U5.7
  Bottom Layer w0.2: v1(-11.175,7.125) -10.8,7.5 U1.32 ; U1.14 v1(-6,-1.5) ; v1(-5.925,-11.925) -5.75,-11.75 U1.140 ; U1.50 -1.25,10.125 v1(-1.15,10.025) ; U1.122 3.25,-8.425 v1(3.425,-8.25) ; U1.117 5.75,-9.025 v1(6.225,-8.55) ; U1.68 7.75,9.75 v1(7.925,9.575) ; v1(9.15,-5.2) 9.95,-6 U1.104 ; v1(10.125,1.825) 10.125,2.425 10.7,3 U1.86
  other v1: -27.425,-8.375 -12.8,-1.7 -19.375,0.25 -27.65,4.2 -23.725,5.45 -26.325,9.525
HALT#: MOD1.55 U1.121 | length 14.1
  Signal Layer 1 w0.2: v1(4.25,-8.45) 5.075,-7.625 12.525,-7.625 15.06,-10.16 MOD1.55
  Bottom Layer w0.2: U1.121 3.75,-8.95 v1(4.25,-8.45)
INST#: MOD1.49 U1.116 | length 13.1
  Signal Layer 2 w0.2: v1(6.375,-13.525) 6.375,-14.275 6.375,-15.95 6.925,-16.5 11.42,-16.5 MOD1.49
  Bottom Layer w0.2: U1.116 6.25,-13.4 v1(6.375,-13.525)
IORD#: U1.125 U3.2 | length 9.4
  Top Layer w0.2: U3.2 -2.325,-6.625 v1(-1.85,-7.1)
  Signal Layer 2 w0.2: v1(-1.85,-7.1) -1.35,-7.6 -0.225,-7.6 0.175,-8 0.175,-9.475 v1(1.95,-11.25)
  Bottom Layer w0.2: U1.125 1.75,-11.05 v1(1.95,-11.25)
IORQ#: MOD1.45 U1.115 | length 8.7
  Bottom Layer w0.2: U1.115 6.75,-12.75 7.05,-13.05 7.05,-13.95 6.75,-14.25 6.375,-14.625 6.375,-16.535 MOD1.45
IOWR#: U1.123 U3.6 | length 13.9
  Top Layer w0.2: U3.6 -1.675,-0.975 -1.5,-0.8 -0.425,-0.8 -0.25,-0.975 -0.25,-2.15 1,-3.4 2.375,-3.4 v1(2.8,-3.825)
  Bottom Layer w0.2: U1.123 2.75,-6.65 2.275,-6.175 2.275,-5.275 2.8,-4.75 v1(2.8,-3.825)
KCI: R7.1 U1.81 U1.138 | length 28.9
  Top Layer w0.2: R7.1 3.575,4.95 v1(3.575,4.875)
  Bottom Layer w0.2: U1.138 -4.75,-7.75 -4.95,-7.55 -4.95,-6.275 -4.5,-5.825 -3,-5.825 -0.05,-2.875 -0.05,0.05 3.575,3.675 v1(3.575,4.875) 4.2,5.5 U1.81
MCI: R8.1 U1.80 U1.139 | length 30.2
  Top Layer w0.2: v1(6.225,6.275) 6.75,6.275 R8.1
  Bottom Layer w0.2: U1.139 -5.25,-8.725 -5.475,-8.5 -5.475,-6.025 -4.75,-5.3 -3.225,-5.3 -0.575,-2.65 -0.575,0.25 2.85,3.675 2.85,5.225 3.9,6.275 v1(6.225,6.275) 6.5,6 U1.80
MISO: MOD1.94 U1.63 U5.8 | length 34.4
  Top Layer w0.2: v1(-4.025,13.225) -2.225,13.225 -1.675,13.775 -0.45,13.775 v1(0.25,13.075) ; v1(8.8,-3.35) 8.825,-3.35 9.31,-2.865 U5.8
  Signal Layer 1 w0.2: MOD1.94 -6.23,13.85 -4.65,13.85 v1(-4.025,13.225)
  Signal Layer 2 w0.2: v1(0.25,13.075) 2.05,13.075 v1(5.65,9.475) 7.305,7.82 7.305,-1.08 8.8,-2.575 v1(8.8,-3.35)
  Bottom Layer w0.2: U1.63 5.25,9.875 v1(5.65,9.475)
MOSI: MOD1.95 U1.62 U5.9 | length 35.2
  Top Layer w0.2: v1(-4.8,12.9) -4.475,12.575 -1.825,12.575 v1(-1.3,13.1) ; U5.9 8.04,-2.865 v1(8.05,-2.875)
  Signal Layer 2 w0.2: MOD1.95 -6.35,16.51 -6.35,14.45 v1(-4.8,12.9) ; v1(-1.3,13.1) -0.6,12.4 2,12.4 4.975,9.425 v1(4.975,8.9) 6.865,7.01 6.865,-1.69 v1(8.05,-2.875)
  Bottom Layer w0.2: U1.62 4.75,9.125 v1(4.975,8.9)
MRD#: U1.126 U3.1 U4.24 | length 47.3
  Top Layer w0.2: U4.24 -27.559,5.715 -26.044,4.2 -21.475,4.2 -21.1,3.825 -12.925,3.825 -7.925,-1.175 -6.85,-1.175 -6.5,-0.825 v1(-5.075,-0.825) ; v1(-3.55,-3.525) -3.55,-4.625 -2.975,-5.2 U3.1
  Signal Layer 2 w0.2: v1(-3.55,-3.525) -2.575,-4.5 -2.575,-7.65 v1(1.05,-11.275)
  Bottom Layer w0.2: v1(-5.075,-0.825) -3.55,-2.35 v1(-3.55,-3.525) ; v1(1.05,-11.275) 1.25,-11.075 U1.126
MREQ#: MOD1.46 U1.119 | length 11.8
  Signal Layer 2 w0.2: v1(5.35,-8.375) 5.35,-8.9 5.75,-9.3 6.35,-9.3 v1(8.375,-11.325)
  Bottom Layer w0.2: U1.119 4.75,-8.975 v1(5.35,-8.375) ; v1(8.375,-11.325) 9.65,-11.325 10.16,-11.835 MOD1.46
MWR#: U1.124 U3.5 U4.31 | length 46.3
  Top Layer w0.2: U4.31 -31.409,-0.675 -19.8,-0.675 -19.1,-1.375 -14.275,-1.375 -13.3,-2.35 -6.55,-2.35 v1(-6.5,-2.3) ; U3.5 -1.025,-2.175 0.925,-4.125 v1(1.75,-4.125)
  Signal Layer 1 w0.2: v1(-6.5,-2.3) -6,-2.8 0.425,-2.8 v1(1.75,-4.125)
  Bottom Layer w0.2: v1(1.75,-4.125) 1.75,-6.425 2.25,-6.925 U1.124
NetR1_1: R1.1 U2.1 | length 2.4
  Top Layer w0.2: R1.1 5.85,3.5 U2.1
NetR2_1: R2.1 U1.136 | length 3.8
  Top Layer w0.2: R2.1 -3.4,-8.425 v1(-3.4,-7.4)
  Bottom Layer w0.2: U1.136 -3.75,-7.75 v1(-3.4,-7.4)
NetR5_1: R5.1 U1.83 | length 8.2
  Top Layer w0.2: v1(5,4.625) R5.1
  Bottom Layer w0.2: v1(5,4.625) 8.3,4.625 8.825,4.1 9.65,4.1 10.05,4.5 U1.83
NetR6_1: R6.1 U1.82 | length 3.4
  Top Layer w0.2: v1(9.375,4.8) 9.375,5.65 R6.1
  Bottom Layer w0.2: v1(9.375,4.8) 9.575,5 U1.82
NMI#: MOD1.52 U1.135 | length 26.2
  Signal Layer 1 w0.2: v1(3.8,-14.25) 3.8,-15.925 4.375,-16.5 16.52,-16.5 MOD1.52
  Bottom Layer w0.2: U1.135 -3.25,-11.625 -1.14,-13.735 3.285,-13.735 v1(3.8,-14.25)
PB0: MOD1.88 U1.58 | length 5.2
  Bottom Layer w0.2: MOD1.88 0.385,15.24 2.75,12.875 U1.58
PB4: MOD1.92 U1.57 | length 9.6
  Signal Layer 1 w0.2: MOD1.92 -3.64,13.8 v1(0.725,13.8)
  Bottom Layer w0.2: v1(0.725,13.8) 1.05,13.8 2.25,12.6 U1.57
PS2KC: MOD1.83 R7.2 | length 12.1
  Top Layer w0.2: R7.2 6.35,11.325 6.35,16.51 MOD1.83
PS2KD: MOD1.82 R5.2 | length 8.9
  Top Layer w0.2: R5.2 7.975,10.7 7.975,14.885 MOD1.82
PS2MC: MOD1.81 R8.2 | length 11.3
  Top Layer w0.2: R8.2 8.9,9.375 8.9,16.52 MOD1.81
PS2MD: MOD1.80 R6.2 | length 7.8
  Top Layer w0.2: R6.2 9.5,14.58 MOD1.80
RD#: MOD1.47 U3.7 | length 27.1
  Top Layer w0.2: U3.7 -2.325,-0.9 -1.7,-0.275 -0.25,-0.275 0.25,-0.775 0.25,-1.95 0.425,-2.125 1.25,-2.95 3.075,-2.95 4.725,-4.6 v1(5.875,-4.6)
  Signal Layer 2 w0.2: v1(5.875,-4.6) 6.95,-5.675 6.95,-8.875 9.15,-11.075 9.15,-11.775 8.85,-12.075 v1(8.9,-12.075)
  Bottom Layer w0.2: v1(8.9,-12.075) 8.9,-16.52 MOD1.47
RI0: MOD1.75 U1.52 | length 20
  Signal Layer 1 w0.2: v1(-0.3,9.7) -0.3,10.325 1.45,12.075 12.075,12.075 MOD1.75
  Bottom Layer w0.2: v1(-0.3,9.7) -0.25,9.75 U1.52
ROM#: R3.1 U1.42 U4.22 | length 35.9
  Top Layer w0.2: U4.22 -33.95,9.566 -33.95,11.55 -33.425,12.075 -23.95,12.075 -23.3,11.425 -7.625,11.425 -6.375,10.175 v1(-5.4,10.175) -5.4,9.075 R3.1
  Bottom Layer w0.2: v1(-5.4,10.175) -5.25,10.325 U1.42
RST#: MOD1.103 U1.134 | length 26.3
  Top Layer w0.2: v1(16.5,-13.95) 16.5,-16.5 MOD1.103
  Signal Layer 1 w0.2: v1(5.325,-13.575) 5.915,-14.165 6.835,-14.165 7.05,-13.95 v1(16.5,-13.95)
  Bottom Layer w0.2: U1.134 -2.75,-11.375 -0.83,-13.295 3.595,-13.295 3.875,-13.575 v1(5.325,-13.575)
RTC#: R4.1 U1.47 U5.6 | length 30.1
  Top Layer w0.2: v1(8.04,-5.125) U5.6 8.04,-7.54 8.625,-8.125 11.85,-8.125 R4.1
  Signal Layer 2 w0.2: v1(0.425,8.1) 3.175,8.1 6.25,5.025 6.25,-2.2 8.04,-3.99 v1(8.04,-5.125)
  Bottom Layer w0.2: U1.47 -2.75,10.5 -0.35,8.1 v1(0.425,8.1)
RTCXI: MOD1.59 U5.1 | length 16.3
  Top Layer w0.2: U5.1 1.69,-5.685 2.375,-5 v1(3.6,-5)
  Signal Layer 1 w0.2: v1(3.6,-5) 5.125,-6.525 13.795,-6.525 MOD1.59
RTCXO: MOD1.58 U5.2 | length 17.9
  Top Layer w0.2: U5.2 2.96,-5.715 v1(2.975,-5.7)
  Signal Layer 1 w0.2: v1(2.975,-5.7) 4.4,-7.125 12.775,-7.125 14.55,-8.9 16.5,-8.9 MOD1.58
RTS0: MOD1.70 U1.88 | length 13.5
  Signal Layer 1 w0.2: v1(13.75,9.275) 14.125,8.9 16.5,8.9 MOD1.70
  Bottom Layer w0.2: U1.88 12.825,2 13,2.175 13,8.525 v1(13.75,9.275)
RXD0: MOD1.69 U1.90 | length 10.8
  Bottom Layer w0.2: U1.90 13.325,1 13.975,1.65 13.975,3.275 14.5,3.8 15.775,3.8 16.525,4.55 16.525,6.335 MOD1.69
RXD1: MOD1.77 U1.55 | length 21.6
  Signal Layer 1 w0.2: v1(1.525,9.65) 2.9,11.025 12.85,11.025 v1(13.775,11.95)
  Signal Layer 2 w0.2: v1(13.775,11.95) 13.975,12.15 13.975,16.515 MOD1.77
  Bottom Layer w0.2: U1.55 1.25,9.925 v1(1.525,9.65)
SCL: MOD1.99 U1.49 | length 15.1
  Bottom Layer w0.2: MOD1.99 -11.42,16.5 -4.275,16.5 -3.8,16.025 -3.8,14.65 -1.75,12.6 U1.49
SCLK: MOD1.91 U1.64 U5.10 | length 37
  Top Layer w0.2: U5.10 6.77,-2.87 7.95,-4.05 v1(9.45,-4.05)
  Signal Layer 1 w0.2: MOD1.91 -1.83,17.78 -0.55,16.5 0.775,16.5 1.3,15.975 1.3,14.45 2.175,13.575 7.075,13.575 v1(7.1,13.55)
  Signal Layer 2 w0.2: v1(6.35,10.05) 7.745,8.655 7.745,-0.745 9.45,-2.45 v1(9.45,-4.05)
  Bottom Layer w0.2: v1(6.35,10.05) 6.025,10.05 5.75,10.325 U1.64 5.75,12.725 6.575,13.55 v1(7.1,13.55)
SD#: MOD1.90 U1.79 | length 22.8
  Signal Layer 2 w0.2: MOD1.90@-2.5,15.2 MOD1.90 -2.54,9.34 -0.2,7 v1(-0.2,5.975)
  Bottom Layer w0.2: v1(-0.2,5.975) 0.75,6.925 6.6,6.925 7.025,6.5 U1.79
SDA: MOD1.98 U1.48 | length 12.6
  Bottom Layer w0.2: MOD1.98 -11.435,13.975 -3.8,13.975 -2.25,12.425 U1.48
TP#: MOD1.89 U1.51 | length 7.2
  Bottom Layer w0.2: U1.51 -0.75,12.7 -0.6,12.85 -0.6,13.325 -1.275,14 -1.275,15.725 0,17 MOD1.89
TPIRQ#: MOD1.79 U1.137 | length 55.8
  Signal Layer 1 w0.2: v1(-4.25,-6.65) -3.225,-6.65 -2.125,-7.75 1.8,-7.75 3.4,-9.35 8.675,-9.35 9.05,-9.725 v1(13.3,-9.725)
  Signal Layer 2 w0.2: MOD1.79 11.45,16.53 11.45,8.8 8.185,5.535 8.185,-0.425 10.1,-2.34 10.1,-8.05 9.65,-8.5 9.65,-9.125 10.25,-9.725 v1(13.3,-9.725)
  Bottom Layer w0.2: U1.137 v1(-4.25,-6.65)
TXD0: MOD1.68 U1.91 | length 9.2
  Bottom Layer w0.2: U1.91 13.575,0.5 14.325,1.25 16.075,1.25 16.525,1.7 16.525,3.825 MOD1.68
TXD1: MOD1.76 U1.54 | length 21
  Signal Layer 1 w0.2: v1(0.575,9.95) 2.15,11.525 12.3,11.525 14.75,13.975 16.515,13.975 MOD1.76
  Bottom Layer w0.2: v1(0.575,9.95) 0.75,10.125 U1.54
Vrtc: MOD1.60 U5.3 | length 16.5
  Top Layer w0.2: U5.3 4.23,-5.77 4.55,-5.45 v1(5.175,-5.45)
  Signal Layer 1 w0.2: v1(5.175,-5.45) 5.7,-5.975 12.325,-5.975 14.475,-3.825 16.525,-3.825 MOD1.60
WAIT#: MOD1.50 U1.130 | length 21
  Signal Layer 2 w0.2: v1(4.075,-11.5) 5.625,-11.5 7.6,-13.475 10.2,-13.475 11.425,-14.7 11.425,-15.8 12.125,-16.5 13.98,-16.5 MOD1.50
  Bottom Layer w0.2: U1.130 -0.75,-11.175 0.05,-11.975 2.875,-11.975 3.35,-11.5 v1(4.075,-11.5)
WR#: MOD1.48 U3.3 | length 19.5
  Top Layer w0.2: U3.3 -1.675,-6.35 -1.225,-6.8 v1(-0.45,-6.8)
  Signal Layer 2 w0.2: v1(-0.45,-6.8) -0.15,-6.8 0.775,-7.725 0.775,-9.05 2.5,-10.775 5.725,-10.775 7.9,-12.95 10.41,-12.95 MOD1.48
XIN: MOD1.85
XOUT: MOD1.86
XST#: MOD1.93 U1.78 | length 25.7
  Signal Layer 2 w0.2: MOD1.93 -3.8,16.5 -3.8,14.425 -3.025,13.65 -3.025,9.125 -1.025,7.125 v1(-1.025,6.875)
  Bottom Layer w0.2: v1(-1.025,6.875) -0.5,7.4 6.825,7.4 7.225,7 U1.78
ZCL: MOD1.63
ZDA: MOD1.65
pads on no net: MOD1.62 MOD1.64 MOD1.66 MOD1.101 MOD1.102 MOD1.104 U1.0 U1.53 U1.56 U1.60 U1.65 U1.66 U1.67 U1.69 U1.70 U1.71 U1.72 U1.73 U1.74 U1.75 U1.76 U1.87 U1.92 U1.93 U1.94 U1.96 U1.97 U1.98 U1.99 U1.100 U1.101 U1.102 U1.103 U1.105 U1.106 U1.107 U1.108 U1.110 U1.111 U1.112 U1.114 U1.118 U1.120 U1.129 U5.4 U5.5 U5.11 U5.12 U5.13

## Polygon pours and split planes (outlines as drawn)
GND on Signal Layer 2 "GND_L03_P002" (solid, remove dead copper, pour order 2): -37.5,-18.5 18.5,-18.5 18.5,18.5 -36.75,18.5 -37.5,17.75
GND on Signal Layer 1 "GND_L02_P000" (solid, remove dead copper, pour order 0): -37.5,-18.5 18.5,-18.5 18.5,18.5 -36.75,18.5 -37.5,17.75
GND on Top Layer "GND_L01_P006" (solid, remove dead copper, pour order 6): -37.5,-18.5 18.5,-18.5 18.5,18.5 -36.75,18.5 -37.5,17.75
GND on Bottom Layer "GND_L04_P004" (solid, remove dead copper, pour order 4): -37.5,-18.5 18.5,-18.5 18.5,18.5 -36.75,18.5 -37.5,17.75

## Silkscreen, mask and mechanical layers (free items; w line width, h text height)
Top Overlay:
  rectangle: -13.589,12.314 -12.339,13.589
  text "Z380-Z20X" at -37.25,-18 h2
Bottom Overlay:
  text "HEADERS ON THIS SIDE" at -20.955,15.875 h1.5
  text "Z20X CPU" at -24.765,-16.51 h2
  text "(C) KnivD, 2020" at -24.765,-18.415 h2
Mechanical 1:
  the board outline again, w0.35